# Altium PCB Battery.PcbDoc
Units mm, origin at the board's own origin, x right, y up, seen from the top; angles counter-clockwise.
Board outline 33.15 x 33.15 mm, 2 copper layers (Top Layer, Bottom Layer); 24 components, 15 nets, 90 pads, 2 vias.
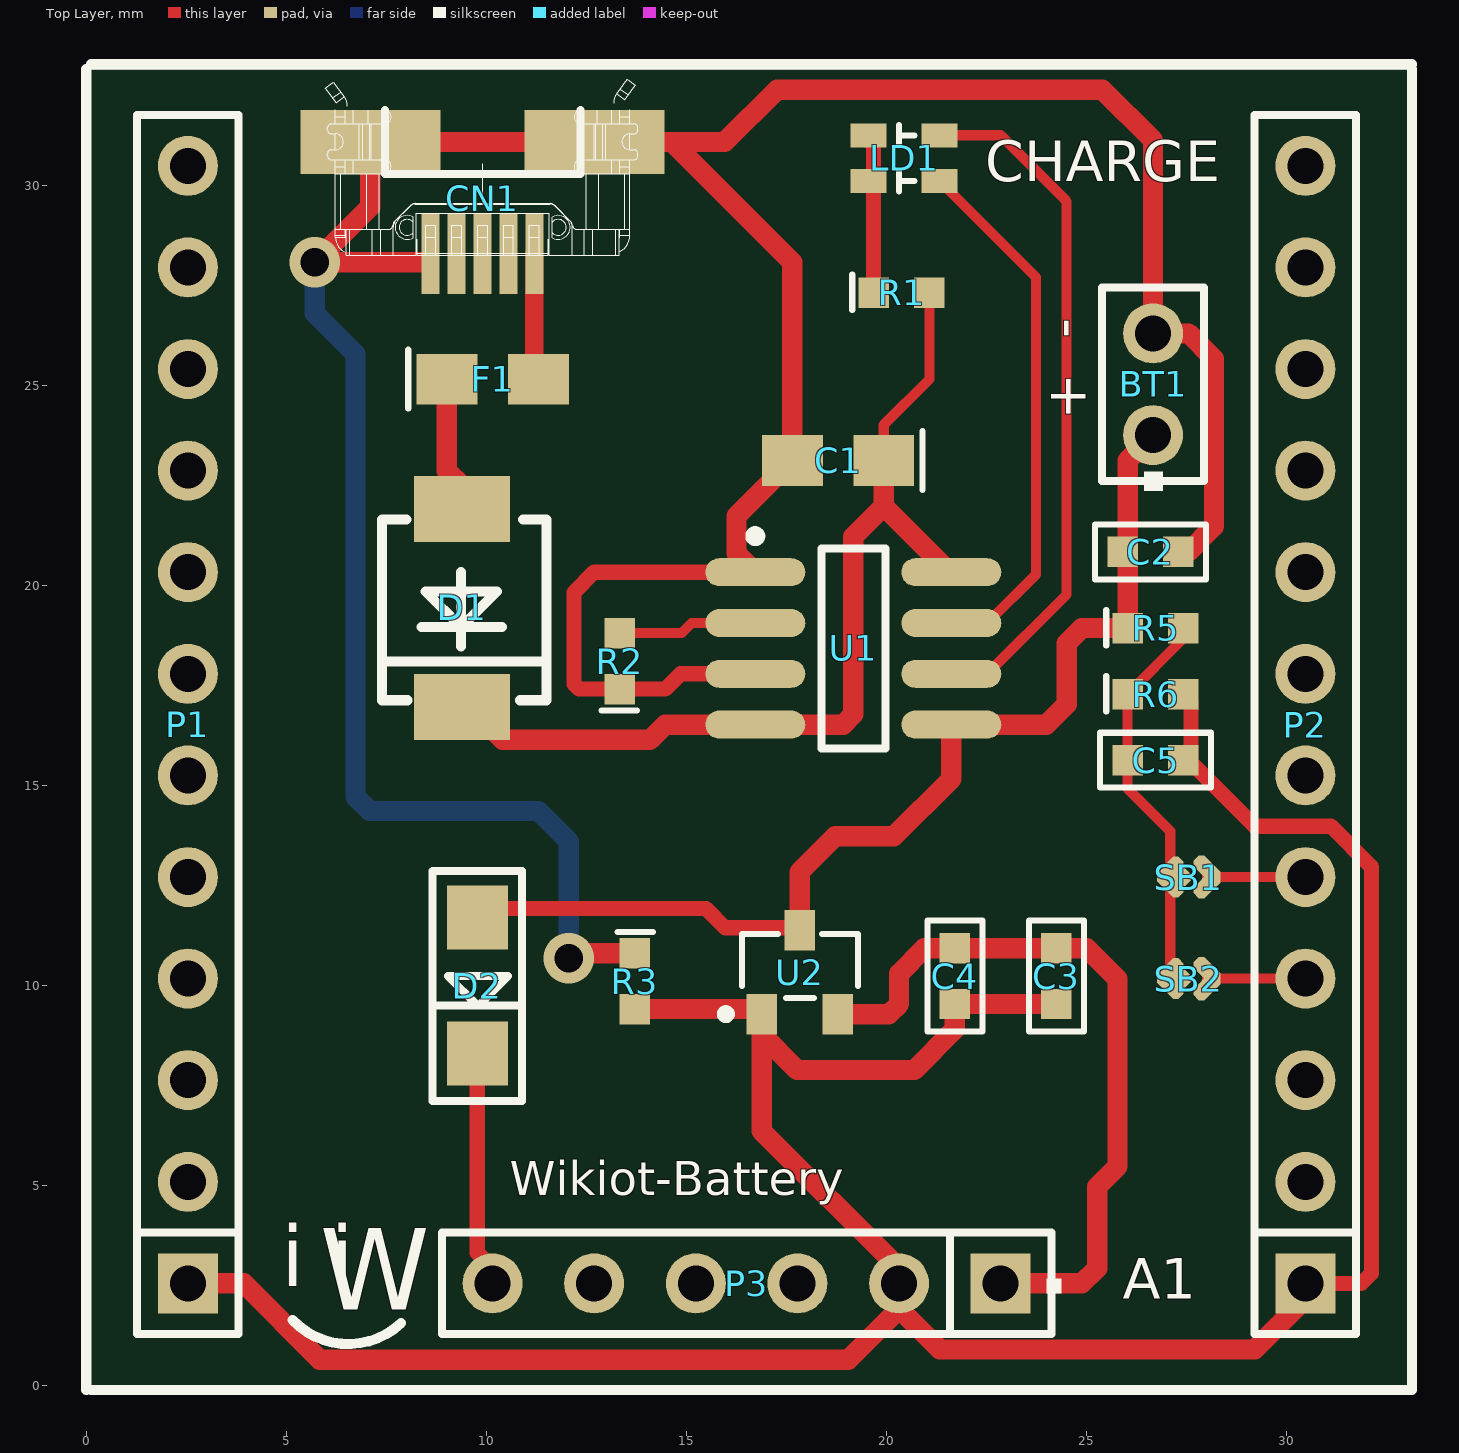
[diagram p0: Top Layer view]
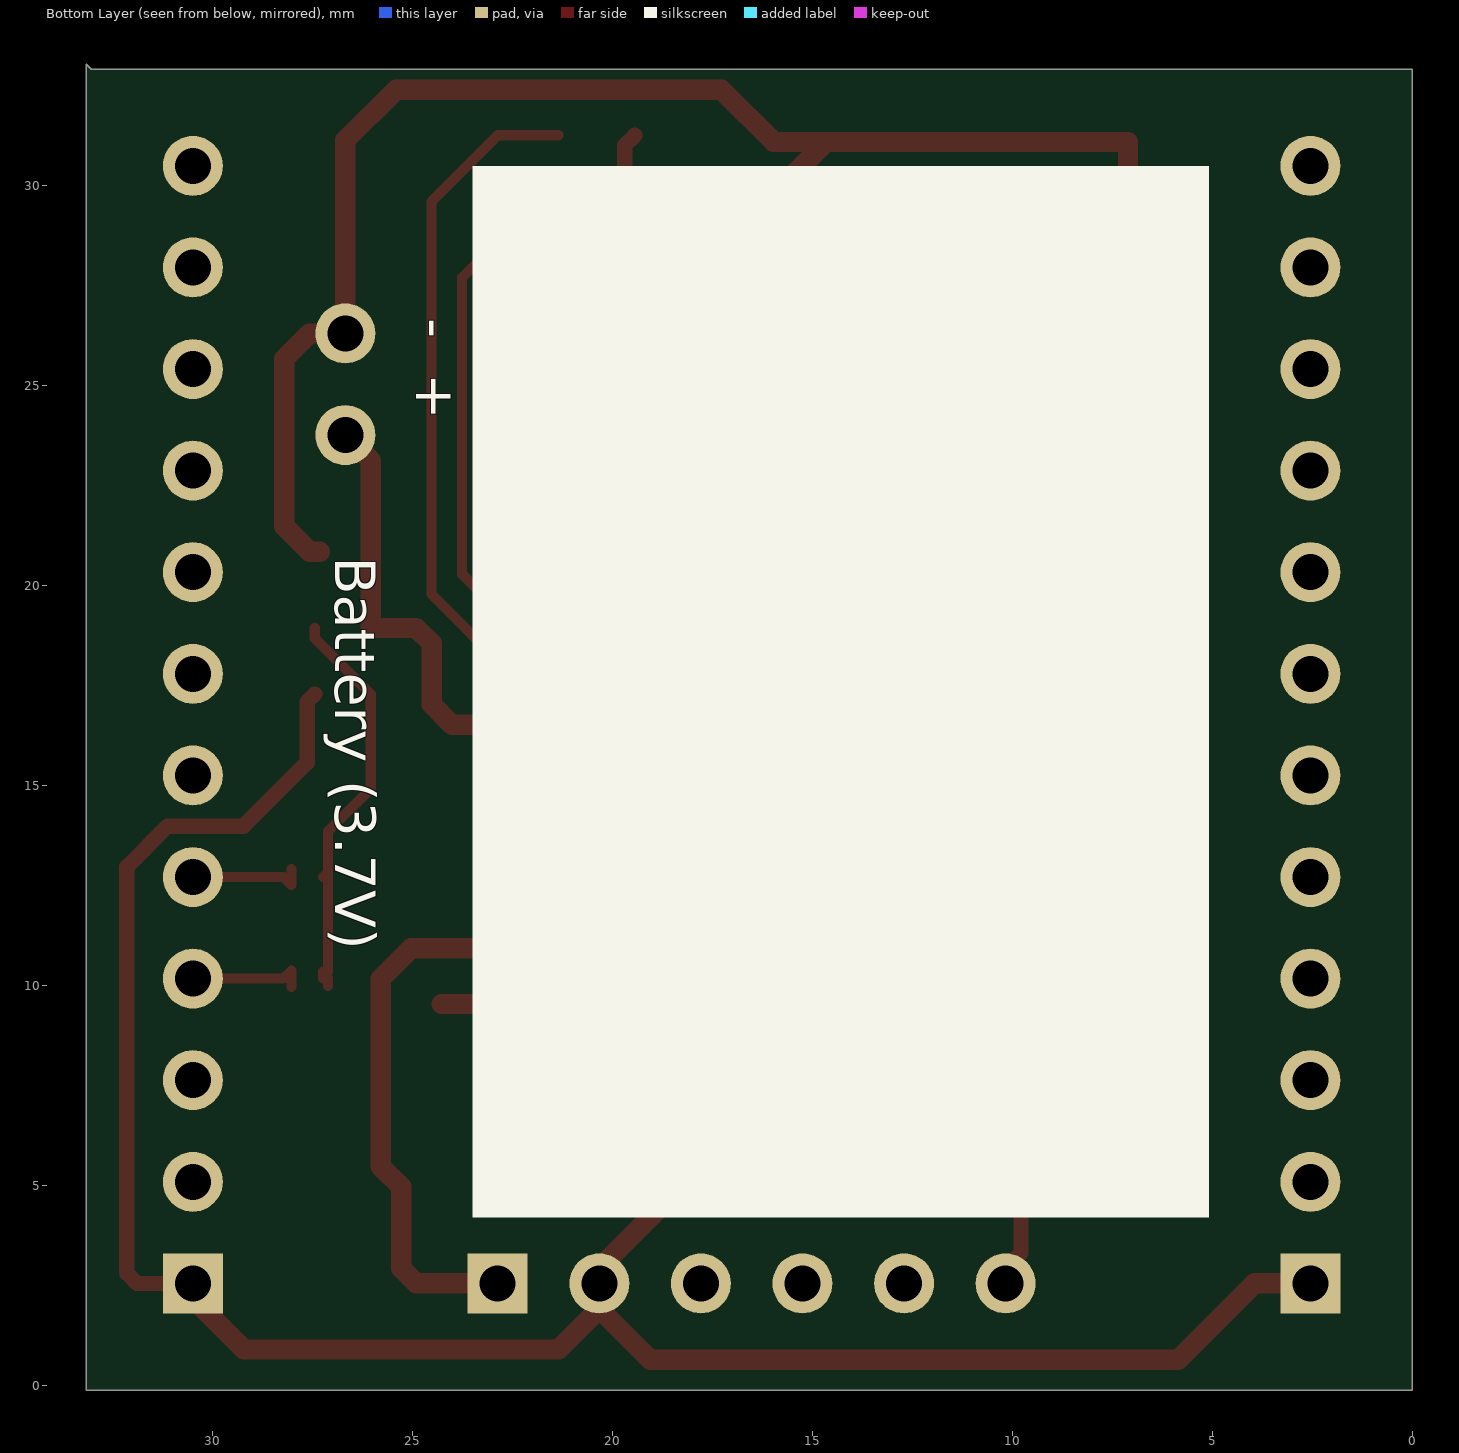
[diagram p1: Bottom Layer view, seen from below]

## Layer stack, top to bottom
Top Solder: solder mask 0.0102, Solder Resist, Dk 3.5
Top Layer: signal copper 0.0356
Dielectric 1: dielectric 0.32, FR-4, Dk 4.8
Bottom Layer: signal copper 0.0356
Bottom Solder: solder mask 0.0102, Solder Resist, Dk 3.5

## Board outline
0,-0.127 0,32.893 33.02,32.893 33.147,33.02 33.147,-0.127

## Design rules (kind name [scope] priority, off if disabled: settings)
Clearance [All] p1: gap=0.178
PolygonConnect [All] p1: connectstyle=Relief reliefconductorwidth=0.254 reliefentries=4 polygonreliefangle="90 Angle" airgapwidth=0.254
RoomDefinition Battery [InComponentClass('Battery')] p1: confinementstyle=ConfineIn formatcopy=TRUE lockcomponents=FALSE outline 0.127,-0.127 33.084,-0.127 33.084,32.957 0.127,32.957
RoutingVias [All] p1: holewidth=0.711 width=1.27 viastyle="Through Hole" minholewidth=0.711 minwidth=1.27 maxholewidth=0.711 maxwidth=1.27
SolderMaskExpansion [All] p1: expansion=0.102
Width [All] p1: maxlimit=0.508 minlimit=0.254 preferedwidth=0.254
30 further rules are at their usual default settings.

## Classes and differential pairs
component class Battery: BT1 C1 C2 C3 C4 CN1 D1 D2 F1 LD1 P1 P2 P3 R1 R2 R3 R5 R6 SB1 SB2 U1 U2

## Components (designator, comment, footprint, x,y, rotation, side; value= is the part's Value field where it differs from the comment)
BT1 "Battery" HDR1X2/2.54mm 26.67,23.749 r90 top
C1 "22uF" 0805 19.939,23.114 r180 top
C2 "10uF" 0603C 27.305,20.828 r180 top
C3 "0.1uF" 0603C 24.257,9.525 r90 top
C4 "1uF" 0603C 21.717,9.525 r90 top
C5 "0.1uF" 0603C 27.432,15.621 r180 top
CN1 "USB-Micro" USB-MICRO-Female-Lite 9.906,30.988 r0 top
D1 "SS14" SMB 9.398,19.431 r90 top
D2 "1N4148" SOD80 9.779,11.684 r90 top
F1 "500mA" 0805 9.017,25.146 r0 top
LD1 "LTST-C195KGJRKT" 0805-LED-Bi 21.463,30.607 r180 top
P1 "Synio Header-L 12-Pin" HDR1X12/2.54MM 2.54,2.54 r90 top
P2 "Synio Header-R 12-Pin" HDR1X12/2.54MM 30.48,2.54 r90 top
P3 "Synio Power Header 6 Pin" HDR1X6/2.54MM 22.86,2.54 r180 top
R1 "5.1K" 0603M 19.685,27.305 r0 top
R2 "1K2" 0603M 13.335,17.399 r90 top
R3 "0" 0603M 13.716,10.795 r270 top
R5 "10K 1%" 0603M 26.035,18.923 r0 top
R6 "10K 1%" 0603M 26.035,17.272 r0 top
SB1 "Circuit Breaker" JP2_SMD 27.559,12.7 r180 top
SB2 "Circuit Breaker" JP2_SMD 27.559,10.16 r180 top
U1 "TP4056" SO8_M 19.177,18.415 r0 top
U2 "XC6206" SOT-23A 16.891,9.271 r0 top
? "LOGO" LOGO 6.477,2.54 r0 top

## Footprints (in the part's own frame and the unit in brackets; to place one, negate y for a bottom-side part, rotate by r counter-clockwise, add the part's x,y. Pads: shape width x height; smd on the part's side, far side on the other; paste and mask are expansions set on the pad)
0603C [mil]
  rect 30x30 smd: 1(0,0) 2(55,0)
  silkscreen extent -27,-27 82,27, body extent -4,-16 59,16, height 12
0603M [mil]
  rect 30x30 smd: 1(0,0) 2(55,0)
  silkscreen extent -21,-17 -21,18, body extent -5,-15 60,15, height 43
0805 [mil]
  rect 60x50 smd: 1(0,0) 2(90,0)
  silkscreen extent -38,-29 -38,29
0805-LED-Bi [mm]
  rect 0.9x0.6 smd: 1(0.127,-0.635) 2(0.127,0.508) 3(1.905,0.508) 4(1.905,-0.635)
  silkscreen extent 0.76,-0.89 1.14,0.76, body extent 0.32,-1.02 1.72,0.9, height 1.1
HDR1X2/2.54mm [mm]
  round 1.5 hole 0.9: 1(0,0) 2(2.54,0)
  silkscreen extent -1.4,-1.27 3.68,1.27, body extent -1.29,-1.5 3.79,1.42, height 8.51
HDR1X6/2.54MM [mm] "Connector; Header; 6 Position"
  rect 1.5x1.5 hole 0.9: 1(0,0)
  round 1.5 hole 0.9: 2(2.54,0) 3(5.08,0) 4(7.62,0) 5(10.16,0) 6(12.7,0)
  silkscreen extent -1.52,-1.27 13.97,1.27, body extent -1.32,-1.5 13.92,1.42, height 8.51
HDR1X12/2.54MM [mm] "Connector; Header; 12 Position"
  rect 1.5x1.5 hole 0.9: 1(0,0)
  round 1.5 hole 0.9: 2(2.54,0) 3(5.08,0) 4(7.62,0) 5(10.16,0) 6(12.7,0) 7(15.24,0) 8(17.78,0) 9(20.32,0) 10(22.86,0) 11(25.4,0) 12(27.94,0)
  silkscreen extent -1.27,-1.27 29.21,1.27, body extent -1.29,-1.48 29.19,1.44, height 8.51
JP2_SMD [mil]
  oct 15x30 smd rot 45: 1(-18,-8) 2(18,7)
  oct 15.75x30 smd rot 135: 1(-18,8)
  rect 26x26 smd rot 45: 2(13,0)
  oct 15x30 smd rot 135: 2(18,-7)
LOGO [mm]
  silkscreen extent -1.32,-1.52 1.4,-0.91
SMB [mm] "DO-214AA"
  rect 1.65x2.4 smd: 1(2.475,0) 2(-2.475,0)
  silkscreen extent -2.31,-2.11 2.21,2.01, body extent -2.75,-1.98 2.75,1.92, height 2.45
SO8_M [mm] "SOIC, 8-Leads, Body 4.9x3.9mm, Pitch 1.27mm, IPC Low Density"
  oval 2.5x0.7 smd: 1(-2.45,1.905) 2(-2.45,0.635) 3(-2.45,-0.635) 4(-2.45,-1.905) 5(2.45,-1.905) 6(2.45,-0.635) 7(2.45,0.635) 8(2.45,1.905)
  silkscreen extent -2.57,-2.5 0.8,2.93, body extent -2,-2.5 2,2.5, height 1.75
SOD80 [mm] "LL34"
  rect 1.6x1.524 smd: 1(0,0) 2(-3.4,0)
  silkscreen extent -4.59,-1.12 1.17,1.12, body extent -3.53,-0.75 -0.03,0.75, height 1.5
SOT-23A [mil] "SOT-23 footprint"
  rect 30x40 smd: 1(0,0) 2(74.8,0) 3(37.4,82.68)
  silkscreen extent -39,-4 94,79, body extent -20,-5 95,87, height 39
USB-MICRO-Female-Lite [mm] "Connector; USB2.0, Type B, SM; 5 Position; Right Angle"
  rect 3.5x1.6 smd: 0(-2.802,0.088) 0(2.798,0.088)
  rect 0.45x2 smd: 1(1.298,-2.714) 2(0.648,-2.714) 3(-0.002,-2.714) 4(-0.652,-2.714) 5(-1.302,-2.714)
  silkscreen extent -3.92,-2.74 3.88,1.65

## Part data
BT1: "Multicell Battery"
C1 C2 C3 C4 C5: library part Cap, "Capacitor"
D1: library part "D Schottky", "Schottky Diode"
D2: library part "Diode 1N4148", "High Conductance Fast Diode"
F1: library part "Fuse 1", "Fuse"
LD1: "Avago, HSMF-A203 Bi-Color LED"
P1: "Synio Header-L, 12-Pin"
P2: "Synio Header-R, 12-Pin"
R1 R2: library part Res1, "Resistor"
R3 R5 R6: library part Res2, "Resistor"
U1: library part "Li-Charging IC", "Li-Charging IC"

## Via types
v1: diameter 1.27, hole 0.711, Top Layer to Bottom Layer, 2 vias

## Nets (pads, with @x,y where several pads share a name; then routed paths per layer and width w, separated by ;. In a path a pad name is that pad's centre, name@x,y a point inside that pad or via, vN(x,y) a via of type N, cw(c..) or ccw(c..) an arc to the next point about the centre after c; other vN are vias at no path point)
AGND: BT1.2 C1.2 C2.1 CN1.0 CN1.5 R2.1 R3.1 U1.1 U1.3 | length 87.8
  Top Layer w0.254: CN1.5@8.598,28.274 CN1.5 ; R3.1 R3.1@13.843,10.922
  Top Layer w0.381: U1.3 14.859,17.78 14.478,17.399 R2.1 12.319,17.399 12.192,17.526 12.192,19.812 12.7,20.32 U1.1
  Top Layer w0.508: CN1.5@8.391,28.067 v1(5.715,28.067) 7.104,29.456 7.104,31.076 12.704,31.076 14.644,31.076 ; v1(12.065,10.668) 12.192,10.795 R3.1 ; U1.1 16.256,20.791 16.256,21.717 C1.2 17.653,28.067 14.644,31.076 ; C2.1 27.559,20.828 28.194,21.463 28.194,25.654 27.559,26.289 BT1.2 26.67,31.115 25.4,32.385 17.272,32.385 15.963,31.076 14.644,31.076
  Bottom Layer w0.508: v1(5.715,28.067) 5.715,26.797 6.731,25.781 6.731,14.707 7.087,14.351 11.303,14.351 12.065,13.589 v1(12.065,10.668)
BAT_MS: C5.2 R5.2 R6.1 SB1.2 SB2.2 | length 10.4
  Top Layer w0.254: SB2.2@27.102,9.982 27.102,10.16 27.229,10.16 27.229,10.338 27.102,10.338 27.102,12.522 SB1.2@27.102,12.827 ; SB1.2@27.229,12.7 SB1.2@27.102,12.827 ; R5.2 27.432,18.669 R6.1 26.035,14.91 27.102,13.843 27.102,12.878 SB1.2@27.102,12.827
D3V3: C3.2 C4.2 P3.1 U2.2 | length 18.5
  Top Layer w0.508: U2.2 20.066,9.271 20.32,9.525 20.32,10.287 20.955,10.922 C4.2 C3.2 25.019,10.922 25.781,10.16 25.781,5.461 25.273,4.953 25.273,2.921 24.892,2.54 P3.1
GND: C3.1 C4.1 C5.1 P1.1 P2.1 P3.2 R3.2 R6.2 U2.1 | length 70.7
  Top Layer w0.254: P2.1@30.29,2.349 P2.1
  Top Layer w0.381: R6.2 27.622,17.081 27.622,15.557 29.21,13.97 31.115,13.97 32.131,12.954 32.131,2.794 31.877,2.54 P2.1
  Top Layer w0.508: P1.1 3.937,2.54 5.842,0.635 19.05,0.635 P3.2@20.32,1.905 ; R3.2 16.764,9.398 U2.1 U2.1@16.891,8.763 ; C3.1 C4.1 21.717,8.89 20.701,7.874 17.78,7.874 U2.1@16.891,8.763 ; P2.1@30.29,2.349 30.29,1.968 29.21,0.889 21.336,0.889 P3.2@20.32,1.905 ; U2.1@16.891,8.763 16.891,6.35 20.32,2.921 P3.2 P3.2@20.32,1.905
NetC1_1: C1.1 D1.2 R1.2 U1.4 U1.8 | length 25.1
  Top Layer w0.254: C1.1 19.939,24.003 21.082,25.146 R1.2 ; U1.8@20.574,20.32 21.59,20.32 U1.8
  Top Layer w0.508: D1.2 9.587,16.956 10.414,16.129 14.097,16.129 14.478,16.51 U1.4 18.923,16.51 19.177,16.764 19.177,21.209 19.939,21.971 ; C1.1 19.939,21.971 ; U1.8@21.59,20.32 19.939,21.971
NetCN1_1: CN1.1 F1.2 | length 3.2
  Top Layer w0.457: CN1.1 11.204,25.245 F1.2
NetD1_1: D1.1 F1.1 | length 3.4
  Top Layer w0.254: D1.1 D1.1@9.398,22.479
  Top Layer w0.508: F1.1 9.017,22.86 D1.1@9.398,22.479
NetD2_2: D2.2 P3.6 | length 5.9
  Top Layer w0.254: P3.6 P3.6@10.16,2.921
  Top Layer w0.381: D2.2 9.779,3.302 P3.6@10.16,2.921
NetLD1_1: LD1.1 U1.6 | length 17.4
  Top Layer w0.254: LD1.1 22.86,31.242 24.511,29.591 24.511,19.761 22.53,17.78 U1.6
NetLD1_2: LD1.2 U1.7 | length 13.5
  Top Layer w0.254: LD1.2 23.749,27.686 23.749,20.269 22.53,19.05 U1.7
NetLD1_3: LD1.3 LD1.4 R1.1 | length 4
  Top Layer w0.381: LD1.4@19.431,31.242 19.685,30.988 R1.1
NetP2_4: P2.4 SB2.1 | length 3
  Top Layer w0.254: SB2.1@28.016,9.957 28.016,10.363 28.219,10.16 P2.4
NetP2_5: P2.5 SB1.1 | length 3
  Top Layer w0.254: SB1.1@28.016,12.903 28.016,12.497 28.219,12.7 P2.5
NetR2_2: R2.2 U1.2 | length 3.5
  Top Layer w0.254: R2.2 14.884,18.796 15.138,19.05 U1.2
VBAT: BT1.1 C2.2 D2.1 R5.1 U1.5 U2.3 | length 27.3
  Top Layer w0.254: BT1.1@26.479,23.558 BT1.1
  Top Layer w0.381: D2.1 10.008,11.913 15.494,11.913 15.977,11.43 17.782,11.43 U2.3
  Top Layer w0.508: U2.3 17.841,12.827 18.73,13.716 20.193,13.716 21.627,15.15 U1.5 24.003,16.51 24.511,17.018 24.511,18.542 24.892,18.923 R5.1 26.035,23.114 BT1.1@26.479,23.558
pads on no net: CN1.2 CN1.3 CN1.4 P1.2 P1.3 P1.4 P1.5 P1.6 P1.7 P1.8 P1.9 P1.10 P1.11 P1.12 P2.2 P2.3 P2.6 P2.7 P2.8 P2.9 P2.10 P2.11 P2.12 P3.3 P3.4 P3.5

## Silkscreen, mask and mechanical layers (free items; w line width, h text height)
Top Overlay:
  lines w0.254: 0,-0.127 0,32.893 ; 0.127,-0.127 33.147,-0.127 33.147,32.893 ; 0.127,33.02 33.147,33.02
  text "CHARGE" at 22.479,30.099 h1.02
  text "-  +" at 24.13,26.67 h1.02 r270
  text "Wikiot-Battery" at 10.592,4.75 h0.85
  text "A1" at 25.908,2.159 h1.02
Bottom Overlay:
  rectangle: 5.08,4.191 23.495,30.48
  text "-  +" at 24.892,26.67 h1.02 r90
  text "Battery (3.7V)" at 26.924,20.701 h1.02 r90

## Text inside footprints (layer, text, board x,y; h text height)
?: Top Overlay "i i" at 4.877,2.464 h1.52; Top Overlay "W" at 5.842,1.88 h2.03